# Altium PCB IOT_GRN_POWER V1.0 A.PcbDoc
Units mm, origin at the board's own origin, x right, y up, seen from the top; angles counter-clockwise.
Board outline 60 x 40 mm, 6 copper layers (TOP, L2_GND, L3_IN1, L4_POWER, L5_GND_2, BOTTOM), stack 1.128 mm thick; 4 components, 0 nets, 4 pads, 0 vias.
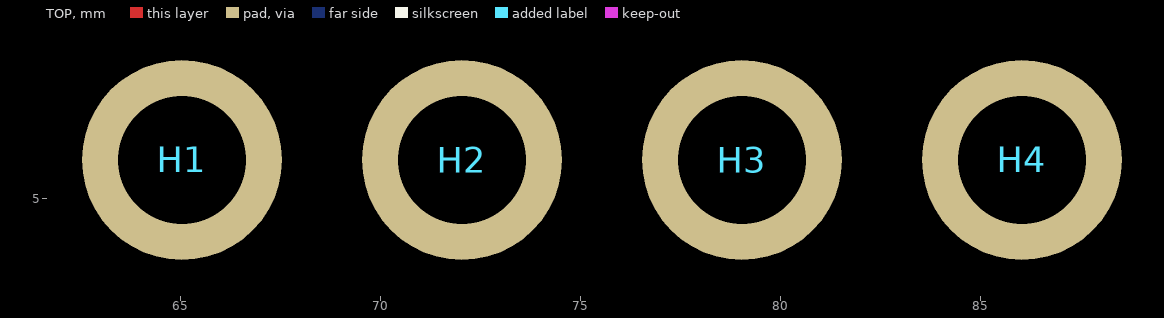
[diagram p0: TOP view]
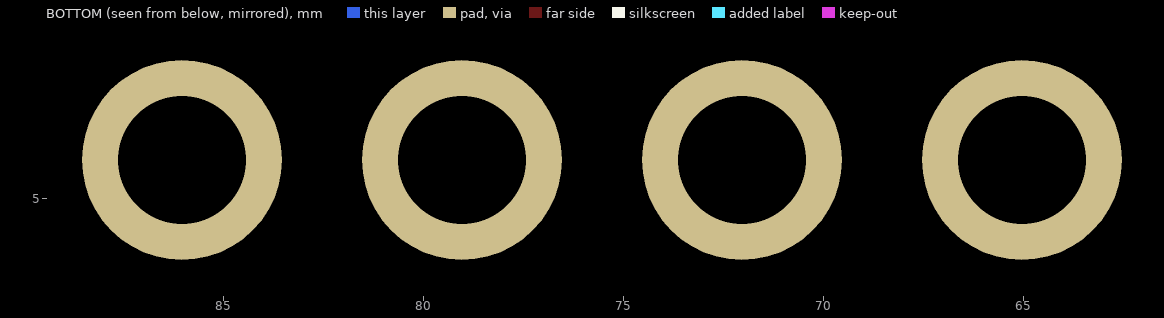
[diagram p1: BOTTOM view, seen from below]

## Layer stack, top to bottom
Top solder: solder mask 0.0102, SM-001, Dk 3.5
TOP: signal copper 0.0292
Dielectric 1: core 0.0635, FR-4, Dk 3.49
L2_GND: signal copper 0.0305
Dielectric 2: core 0.0749, FR-4, Dk 3.97
L3_IN1: signal copper 0.0305
Dielectric 3: core 0.6706, FR-4, Dk 4.2
L4_POWER: signal copper 0.0305
Dielectric 4: core 0.0749, FR4, Dk 3.97
L5_GND_2: signal copper 0.0305
Dielectric 5: core 0.0635, FR-4, Dk 3.49
BOTTOM: signal copper 0.0292
Bottom Solder: solder mask 0.0254, SM-001, Dk 4

## Board outline
0.028,5.025 0.028,35.025 cw(c5.028,35.025) 5.028,40.025 55.028,40.025 cw(c55.028,35.025) 60.028,35.025 60.028,5.025 cw(c55.028,5.025) 55.028,0.025 5.028,0.025 cw(c5.028,5.025)

## Design rules (kind name [scope] priority, off if disabled: settings)
BoardOutlineClearance [(InNet('GND')AND IsPolygon)] p1: gap=0.254 ignorepadtopadclearanceinfootprint=FALSE except(-0.05: Poly-OutlineEdge; 0: Arc-SplitContinuation Track-SplitContinuation SMDPad-SplitContinuation THPad-SplitContinuation Via-SplitContinuation Fill-SplitContinuation Poly-SplitContinuation Region-SplitContinuation Text-SplitContinuation)
Clearance Clearance_DIFF_PAIRS [InNetClass('Z85')] p1: gap=0.1 ignorepadtopadclearanceinfootprint=TRUE except(0.01: Arc-Arc Arc-Track Arc-SMDPad Track-Track Track-SMDPad)
Clearance SD [WithinRoom('SD_TOP') or WithinRoom('SD_BOT')] p2: gap=0.1 ignorepadtopadclearanceinfootprint=TRUE except(0.01: Arc-SMDPad Arc-Via Track-SMDPad Track-Via SMDPad-Via)
Clearance BGA_Polygon [All vs InPolygonClass('BGA_POLY')] p3: gap=0.1 ignorepadtopadclearanceinfootprint=TRUE
Clearance MCU [WithinRoom('BGA_TOP') or WithinRoom('BGA_BOT')] p4: gap=0.01 ignorepadtopadclearanceinfootprint=FALSE except(0.1: Arc-Fill Arc-Poly Arc-Region Track-Fill Track-Poly Track-Region SMDPad-Fill SMDPad-Poly SMDPad-Region Via-Fill Via-Poly Via-Region Fill-Fill Fill-Poly Fill-Region Poly-Poly Poly-Region Region-Region)
Clearance High_Voltage [InPoly vs InNetClass('HV')] p5: gap=0.4 ignorepadtopadclearanceinfootprint=TRUE
Clearance ALL-Polygon [All vs InPolygon] p6: gap=0.254 ignorepadtopadclearanceinfootprint=FALSE
Clearance Via-Pad [IsVia vs IsPad] p7: gap=0.102 ignorepadtopadclearanceinfootprint=FALSE
Clearance Pad-Pad [IsPad vs IsPad] p8: gap=0.127 ignorepadtopadclearanceinfootprint=TRUE
Clearance ALL-ALL [All] p9: gap=0.1 ignorepadtopadclearanceinfootprint=TRUE
ComponentClearance J1_Con_Clearance [InComponent('J1')] p1: gap=-100 collisioncheckmode=3 verticalgap=-100 showdistances=TRUE
ComponentClearance [All] p2: gap=0.254 collisioncheckmode=3 verticalgap=0.178 showdistances=TRUE
DiffPairsRouting DIFF85 [InDifferentialPairClass('Z85')] p1: maxlimit=0.127 minlimit=0.07 mostfreqgap=0.127 toplayer_maxgap=0.07 toplayer_prefgap=0.07 toplayer_minwidth=0.086 toplayer_maxwidth=0.086 toplayer_prefwidth=0.086 midlayer1_mingap=0.127 midlayer1_minwidth=0.062 midlayer1_maxwidth=0.062 midlayer1_prefwidth=0.062 midlayer2_mingap=0.127 midlayer2_minwidth=0.074 midlayer2_maxwidth=0.074 midlayer2_prefwidth=0.074 midlayer3_mingap=0.127 midlayer3_minwidth=0.085 midlayer3_maxwidth=0.085 midlayer3_prefwidth=0.085 midlayer4_mingap=0.127 midlayer4_minwidth=0.062 midlayer4_maxwidth=0.062 midlayer4_prefwidth=0.062 bottomlayer_maxgap=0.07 bottomlayer_prefgap=0.07 bottomlayer_minwidth=0.086 bottomlayer_maxwidth=0.086 bottomlayer_prefwidth=0.086 impedanceprofiledriven=TRUE impedanceprofileid={1B18FFBC-9492-49FF-BB35-B6E47DB3C0E6} impedanceprofilevalue=85.000000 maxuncoupledlength=12.7
DiffPairsRouting DIFF100 [InDifferentialPairClass('Z100')] p2: maxlimit=0.127 minlimit=0.117 mostfreqgap=0.127 toplayer_maxgap=0.117 toplayer_prefgap=0.117 toplayer_minwidth=0.117 toplayer_maxwidth=0.117 toplayer_prefwidth=0.117 midlayer1_mingap=0.127 midlayer1_minwidth=0.039 midlayer1_maxwidth=0.039 midlayer1_prefwidth=0.039 midlayer2_mingap=0.127 midlayer2_minwidth=0.052 midlayer2_maxwidth=0.052 midlayer2_prefwidth=0.052 midlayer3_mingap=0.127 midlayer3_minwidth=0.051 midlayer3_maxwidth=0.051 midlayer3_prefwidth=0.051 midlayer4_mingap=0.127 midlayer4_minwidth=0.039 midlayer4_maxwidth=0.039 midlayer4_prefwidth=0.039 bottomlayer_maxgap=0.117 bottomlayer_prefgap=0.117 bottomlayer_minwidth=0.117 bottomlayer_maxwidth=0.117 bottomlayer_prefwidth=0.117 impedanceprofiledriven=TRUE impedanceprofileid={ED02192B-BE32-4279-82CE-901E357A3B25} impedanceprofilevalue=100.000000 maxuncoupledlength=12.7
DiffPairsRouting DIFF90 [InDifferentialPairClass('Z90')] p3: maxlimit=0.127 minlimit=0.102 mostfreqgap=0.127 toplayer_maxgap=0.102 toplayer_prefgap=0.102 toplayer_minwidth=0.102 toplayer_maxwidth=0.102 toplayer_prefwidth=0.102 midlayer1_mingap=0.127 midlayer1_minwidth=0.054 midlayer1_maxwidth=0.054 midlayer1_prefwidth=0.054 midlayer2_mingap=0.127 midlayer2_minwidth=0.081 midlayer2_maxwidth=0.081 midlayer2_prefwidth=0.081 midlayer3_mingap=0.127 midlayer3_minwidth=0.072 midlayer3_maxwidth=0.072 midlayer3_prefwidth=0.072 midlayer4_mingap=0.127 midlayer4_minwidth=0.054 midlayer4_maxwidth=0.054 midlayer4_prefwidth=0.054 bottomlayer_maxgap=0.102 bottomlayer_prefgap=0.102 bottomlayer_minwidth=0.081 bottomlayer_maxwidth=0.081 bottomlayer_prefwidth=0.081 impedanceprofiledriven=TRUE impedanceprofileid={AB8ACA24-E527-4260-B937-E222CB668D48} impedanceprofilevalue=90.000000 maxuncoupledlength=12.7
Height Height_BOT [(OnLayer('Bottom Layer'))] p2: minheight=0 maxheight=6 prefheight=4
HoleSize [All] p1 off: absolutevalues=TRUE maxlimit=2.54 minlimit=0.025 maxpercent=80.000 minpercent=20.000
HoleToHoleClearance [All] p1: gap=0.009 allowstackedmicrovias=TRUE
MatchedLengths MatchedLengths_eMMC [InNetClass('eMMC')] p1: tolerance=0.1 checknetsindiffpair=FALSE checkdiffpairvsdiffpair=TRUE checkxsignals=TRUE checkothers=TRUE
MatchedLengths DIFF_PAIRS_Z90 [InDifferentialPairClass('Z90')] p2: tolerance=0.1 checknetsindiffpair=TRUE checkdiffpairvsdiffpair=FALSE checkxsignals=FALSE checkothers=FALSE
MatchedLengths DIFF_PAIRS_Z100 [InDifferentialPairClass('Z100')] p3: tolerance=0.1 checknetsindiffpair=TRUE checkdiffpairvsdiffpair=FALSE checkxsignals=FALSE checkothers=FALSE
MatchedLengths ADD_CMD_CTRLB_G3 [InNetClass('ADD_CMD_CTRLB_G3')] p4: tolerance=0.1 checknetsindiffpair=FALSE checkdiffpairvsdiffpair=TRUE checkxsignals=TRUE checkothers=TRUE
MatchedLengths ADD_CMD_CTRLB_G2 [InNetClass('ADD_CMD_CTRLB_G2')] p5: tolerance=0.1 checknetsindiffpair=FALSE checkdiffpairvsdiffpair=TRUE checkxsignals=TRUE checkothers=TRUE
MatchedLengths ADD_CMD_CTRLB_G1 [InNetClass('ADD_CMD_CTRLB_G1')] p6: tolerance=0.1 checknetsindiffpair=FALSE checkdiffpairvsdiffpair=TRUE checkxsignals=TRUE checkothers=TRUE
MatchedLengths ADD_CMD_CTRLA_G3 [InNetClass('ADD_CMD_CTRLA_G3')] p7: tolerance=0.1 checknetsindiffpair=FALSE checkdiffpairvsdiffpair=TRUE checkxsignals=TRUE checkothers=TRUE
MatchedLengths ADD_CMD_CTRLA_G2 [InNetClass('ADD_CMD_CTRLA_G2')] p8: tolerance=0.1 checknetsindiffpair=FALSE checkdiffpairvsdiffpair=TRUE checkxsignals=TRUE checkothers=TRUE
MatchedLengths ADD_CMD_CTRLA_G1 [InNetClass('ADD_CMD_CTRLA_G1')] p9: tolerance=0.1 checknetsindiffpair=FALSE checkdiffpairvsdiffpair=TRUE checkxsignals=TRUE checkothers=TRUE
MatchedLengths DIIFF_PAIRS_Z85 [InDifferentialPairClass('All Differential Pairs')] p10: tolerance=0.1 checknetsindiffpair=TRUE checkdiffpairvsdiffpair=FALSE checkxsignals=FALSE checkothers=FALSE
MinimumSolderMaskSliver [All] p1: minsoldermaskwidth=0.007
PlaneConnect PlaneConnect_1 [IsVia] p1: planeconnectstyle=Direct reliefexpansion=0.508 reliefentries=4 reliefconductorwidth=0.254 reliefairgap=0.254
PlaneConnect [IsPad] p2: planeconnectstyle=Direct reliefexpansion=0.5 reliefentries=4 reliefconductorwidth=0.3 reliefairgap=0.25
PolygonConnect [IsPolygon vs IsPad] p1: connectstyle=Direct reliefconductorwidth=0.3 reliefentries=4 polygonreliefangle="90 Angle" airgapwidth=0.3
PolygonConnect Polygon_Via [IsPolygon vs IsVia] p2: connectstyle=Direct reliefconductorwidth=0.254 reliefentries=4 polygonreliefangle="90 Angle" airgapwidth=0.254
RoutingVias [All] p1: holewidth=0.203 width=1 viastyle="Through Hole" minholewidth=0.203 minwidth=0.355 maxholewidth=3.3 maxwidth=1.27
SilkToSilkClearance [All] p1: silktosilkclearance=0.152
SilkToSolderMaskClearance SilkscreenOverComponentPads [IsPad] p1: minsilkscreentomaskgap=0.002 clearancetoexposedcopper=TRUE
SolderMaskExpansion SolderMaskExpVia [IsVia] p1: expansion=-0.076 istentingtop=TRUE
SolderMaskExpansion SolderMaskExpPad [IsPad] p2: expansion=0.051 istentingtop=FALSE
Width POWER [InNetClass('POWER')] p1: maxlimit=1 minlimit=0.254 preferedwidth=0.3
Width 50Ohm [InNetClass('BANK_A') OR InNetClass('BANK_B') OR InNetClass('DATA_A') OR InNetClass('DATA_B')] p2: maxlimit=0.129 minlimit=0.046 preferedwidth=0.129 toplayer_minwidth=0.12 toplayer_maxwidth=0.12 toplayer_prefwidth=0.12 midlayer1_maxwidth=0.046 midlayer1_prefwidth=0.046 midlayer2_minwidth=0.089 midlayer2_maxwidth=0.089 midlayer2_prefwidth=0.089 midlayer3_minwidth=0.088 midlayer3_maxwidth=0.088 midlayer3_prefwidth=0.088 midlayer4_maxwidth=0.046 midlayer4_prefwidth=0.046 bottomlayer_minwidth=0.129 impedanceprofiledriven=TRUE impedanceprofileid={1991FA12-7785-478B-9A98-AD93C4A866C0} impedanceprofilevalue=50.000000 minimp=50.000000 maximp=50.000000 favimp=50.000000
Width [All] p3: maxlimit=1 minlimit=0.085 preferedwidth=0.127
22 further rules are at their usual default settings.

## Components (designator, comment, footprint, x,y, rotation, side; value= is the part's Value field where it differs from the comment)
H1 "Mounting Hole" PTH_3.2X5 65.028,5.975 r0 top
H2 "Mounting Hole" PTH_3.2X5 72.028,5.975 r0 top
H3 "Mounting Hole" PTH_3.2X5 79.028,5.975 r0 top
H4 "Mounting Hole" PTH_3.2X5 86.028,5.975 r0 top

## Footprints (in the part's own frame and the unit in brackets; to place one, negate y for a bottom-side part, rotate by r counter-clockwise, add the part's x,y. Pads: shape width x height; smd on the part's side, far side on the other; paste and mask are expansions set on the pad)
PTH_3.2X5 [mm] "PTH 3.2mm drill 5mm ring"
  round 5 hole 3.2 paste-10: 1(0,0)

## Part data
H1 H2 H3 H4: library part MECHANICALS_MOUNT_PTH, "Mounting Hole, Plated"

## Nets (pads, with @x,y where several pads share a name; then routed paths per layer and width w, separated by ;. In a path a pad name is that pad's centre, name@x,y a point inside that pad or via, vN(x,y) a via of type N, cw(c..) or ccw(c..) an arc to the next point about the centre after c; other vN are vias at no path point)
pads on no net: H1.1 H2.1 H3.1 H4.1